# Altium PCB MASTERs26_PCB.PcbDoc (part 2 of 3)
Units mm, origin at the board's own origin, x right, y up, seen from the top; angles counter-clockwise.
Board outline 170 x 105 mm, 4 copper layers (Top Layer, Layer 2, PWR, Bottom Layer), stack 1.58 mm thick; 78 components, 59 nets, 255 pads, 54 vias.
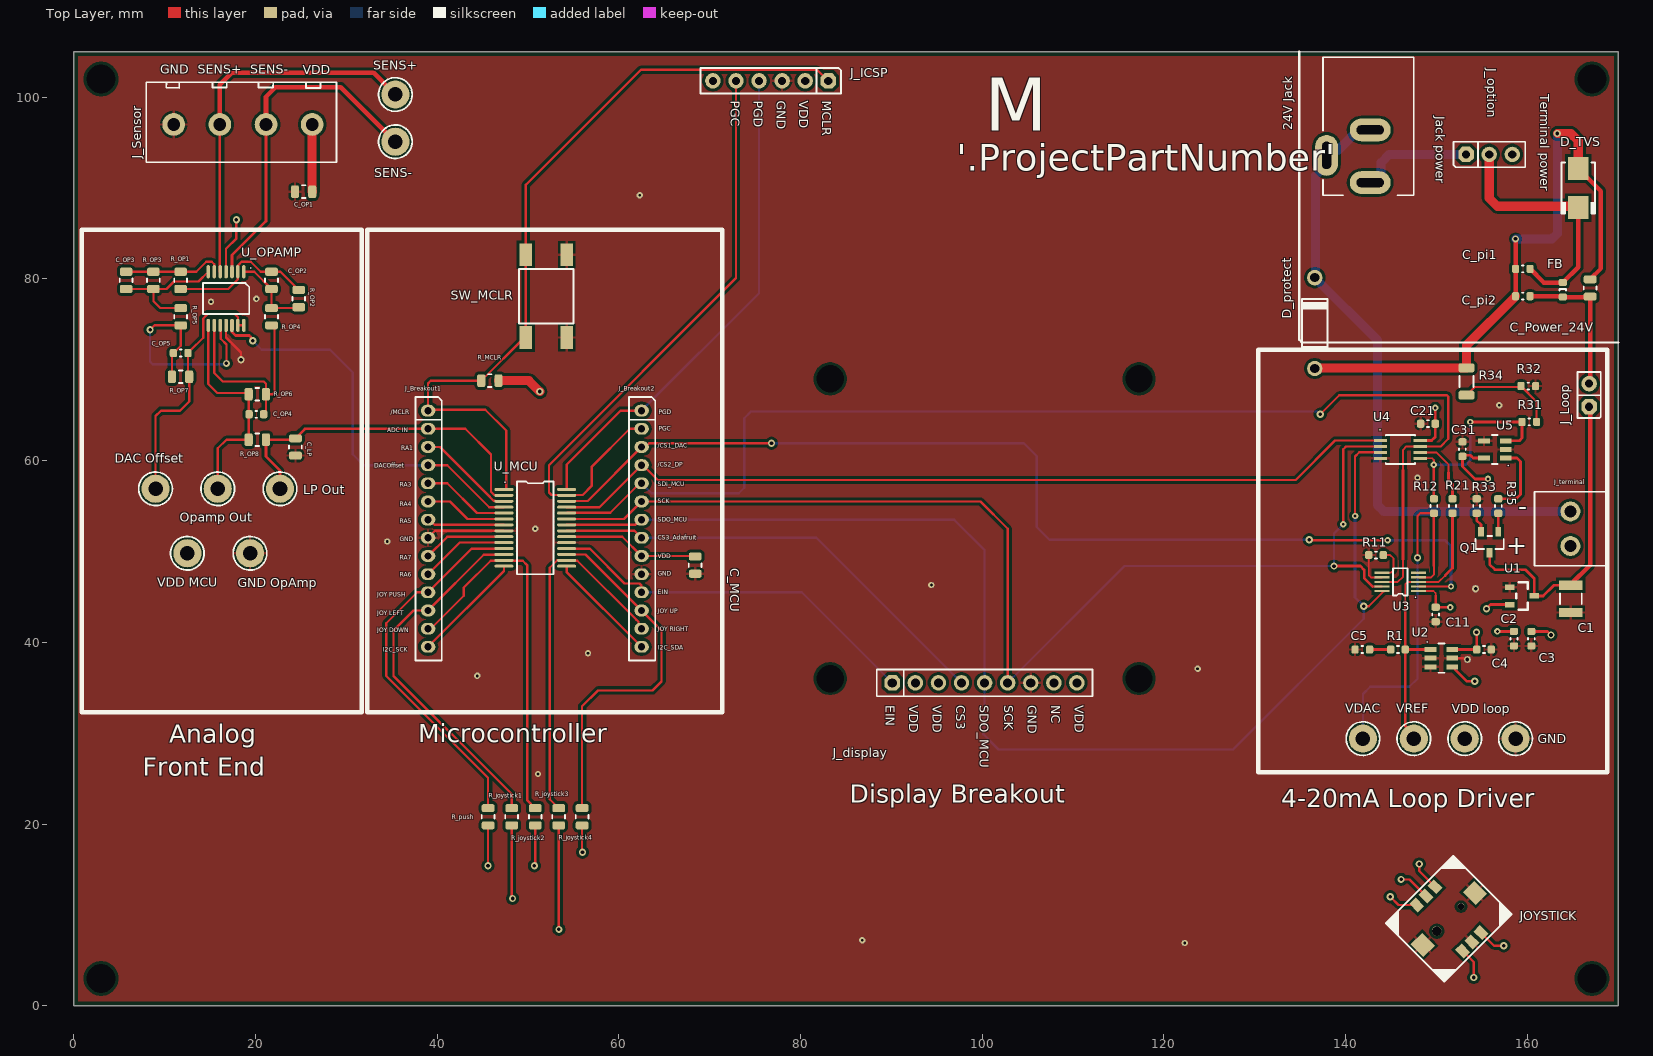
[diagram p0: Top Layer view]

## Part data (continued)
JOYSTICK: library part SWITCH1202, Current=50mA, Manufacturer 1="ALPS ALPINE", Manufacturer Part Number 1=SKRHABE010, Operating Temperature="-40C to 85C", Supplier Part Number 1=688-SKRHAB, Voltage=12VDC, Category=Switch, ComponentLink1Description="SVN Datasheet", ComponentLink1URL=https://chn-vm-apps.microchip.com/mchprepo/parts/Datasheets/SKRH-1370966.pdf, ComponentLink2Description="Local Datasheet", ComponentLink2URL=C:\ALTIUM_WORK\00001_MCHP-CDB\Datasheets\SKRH-1370966.pdf, ComponentLink3Description="Open Symbol", ComponentLink3URL=C:\ALTIUM_WORK\00001_MCHP-CDB\Library\LibraryRefs\SW_TACT_SMD_ALPS_SKRHABE010.SchLib, ComponentLink4Description="Open Footprint", ComponentLink4URL=C:\ALTIUM_WORK\00001_MCHP-CDB\Library\Footprints\SW_TACT_SMD_ALPS_SKRHABE010.PcbLib, ComponentLink5Description="Open Footprint 2", ComponentLink6Description="Open Footprint 3", ComponentLink7Description="Open Footprint 4", Description_="SWITCH JOYSTICK 4-WAY 50mA SKRHABE010 SMD", Dev Tools Status=Production, MCHP-ID=SWITCH1202, Owner="Jesus Aviles", Populated=YES, Quantity Override=1, Restricted Sourcing=No, Revision=2, Status="MCL Design", Supplier 1=Mouser, Symbol=SW_TACT_SMD_ALPS_SKRHABE010, Type=Joystick
PAD1 PAD2 PAD3 PAD4: library part HW1102, Manufacturer 1=3M, Manufacturer Part Number 1="SJ-5003 (BLACK)", Supplier Part Number 1=SJ5003-0-ND, Category=Hardware, ComponentLink1Description="SVN Datasheet", ComponentLink1URL=https://chn-vm-apps.microchip.com/mchprepo/parts/Datasheets/SJ-5003.pdf, ComponentLink2Description="Local Datasheet", ComponentLink2URL=C:\ALTIUM_WORK\00001_MCHP-CDB\Datasheets\SJ-5003.pdf, ComponentLink3Description="Open Symbol", ComponentLink3URL="C:\ALTIUM_WORK\00001_MCHP-CDB\Library\LibraryRefs\Rubber Pad Hemisphere.SchLib", ComponentLink4Description="Open Footprint", ComponentLink4URL=C:\ALTIUM_WORK\00001_MCHP-CDB\Library\Footprints\BUMP_3M_SJ5000_CYLINDRICAL_BLACK_D11.18H5.PcbLib, ComponentLink5Description="Open Footprint 2", ComponentLink6Description="Open Footprint 3", ComponentLink7Description="Open Footprint 4", Description_="MECH HW RUBBER PAD Bumpon Hemisphere 0.44\" x 0.20\" Black", Dev Tools Status=Production, MCHP-ID=HW1102, Owner="Tim Moffat", Populated=MECH, Quantity Override=1, Revision=0, Status="MCL Design", Supplier 1=Digi-Key, Symbol="Rubber Pad Hemisphere", Type="Rubber Pad"
Q1: library part MIC7247, "Transistor MOS", Manufacturer 1="Microchip Technology", Manufacturer Part Number 1=2N7002-G, Operating Temperature="-55C to +150C", Supplier Part Number 1=2N7002-GMCCT-ND, Category=MCHP-Analog, ComponentLink1Description="SVN Datasheet", ComponentLink1URL=https://chn-vm-apps.microchip.com/mchprepo/parts/Datasheets/2N7002.pdf, ComponentLink2Description="Local Datasheet", ComponentLink2URL=C:\ALTIUM_WORK\00001_MCHP-CDB\Datasheets\2N7002.pdf, ComponentLink3Description="Open Symbol", ComponentLink3URL="C:\ALTIUM_WORK\00001_MCHP-CDB\Library\LibraryRefs\Transistor MOS-N GSD.SchLib", ComponentLink4Description="Open Footprint", ComponentLink4URL=C:\ALTIUM_WORK\00001_MCHP-CDB\Library\Footprints\SOT-23-3.PcbLib, ComponentLink5Description="Open Footprint 2", ComponentLink6Description="Open Footprint 3", ComponentLink7Description="Open Footprint 4", Description_="MCHP ANALOG MOSFET N-CH 2N7002-G 60V 115mA SOT-23-3", Dev Tools Status=Production, MCHP-ID=MIC7247, Owner="Mark Loper", Populated=YES, Quantity Override=1, Revision=2, Status="MCL Design", Supplier 1=Digi-Key, Symbol="Transistor MOS-N GSD", Type=MOSFET
R1: library part RSMT0347, "Resistor", Manufacturer 1=Panasonic, Manufacturer 2="NIC Components", Manufacturer 3="Stackpole Electronics Inc", Manufacturer Part Number 1=ERJ-3GEYJ510V, Manufacturer Part Number 2=NRC06J510TRF, Manufacturer Part Number 3=RMCF1/16515%R, Operating Temperature="-55C to +155C", Package=0603, Power=1/10W, Supplier Part Number 1=P51GCT-ND, Temperature Coefficient=200ppm/C, Tolerance=5%, Category=Resistor, ComponentLink1Description="SVN Datasheet", ComponentLink1URL=https://chn-vm-apps.microchip.com/mchprepo/parts/Datasheets/nrc.pdf, ComponentLink2Description="Local Datasheet", ComponentLink2URL=C:\ALTIUM_WORK\00001_MCHP-CDB\Datasheets\nrc.pdf, ComponentLink3Description="Open Symbol", ComponentLink3URL=C:\ALTIUM_WORK\00001_MCHP-CDB\Library\LibraryRefs\Resistor.SchLib, ComponentLink4Description="Open Footprint", ComponentLink4URL=C:\ALTIUM_WORK\00001_MCHP-CDB\Library\Footprints\RES_C_0603.PcbLib, ComponentLink5Description="Open Footprint 2", ComponentLink6Description="Open Footprint 3", ComponentLink7Description="Open Footprint 4", Composition=TKF, Description_="RES TKF 51R 5% 1/10W SMD 0603", Dev Tools Status=Production, MCHP-ID=RSMT0347, Populated=Yes, Quantity Override=1, Revision=1, Status="MCL Design", Supplier 1=Digi-Key, Supplier 2="NIC Components", Supplier 3="Stackpole Electronics Inc", Supplier Part Number 2=NRC06J510TRF, Supplier Part Number 3=RMCF1/16515%R, Symbol=Resistor, Type="RES SMD"
R11: library part RSMT0026, "Resistor", Manufacturer 1=Panasonic, Manufacturer 3=ROHM, Manufacturer 4="Stackpole Electronics Inc", Manufacturer 5="KOA Speer", Manufacturer Part Number 1=ERJ-3GEYJ104V, Manufacturer Part Number 2=ERJ-3GSYJ104V, Manufacturer Part Number 3=MCR03EZPJ104, Manufacturer Part Number 4=RMCF0603JT100K, Manufacturer Part Number 5=RK73B1JTTD104J, Operating Temperature="-55C to +155C", Package=0603, Power=1/10W, Supplier Part Number 1=P100KGTR-ND, Temperature Coefficient=200ppm/C, Tolerance=5%, Voltage=75V, Category=Resistor, ComponentLink1Description="SVN Datasheet", ComponentLink1URL=https://chn-vm-apps.microchip.com/mchprepo/parts/Datasheets/AOA0000CE1.pdf, ComponentLink2Description="Local Datasheet", ComponentLink2URL=C:\ALTIUM_WORK\00001_MCHP-CDB\Datasheets\AOA0000CE1.pdf, ComponentLink3Description="Open Symbol", ComponentLink3URL=C:\ALTIUM_WORK\00001_MCHP-CDB\Library\LibraryRefs\Resistor.SchLib, ComponentLink4Description="Open Footprint", ComponentLink4URL=C:\ALTIUM_WORK\00001_MCHP-CDB\Library\Footprints\RES_C_0603.PcbLib, ComponentLink5Description="Open Footprint 2", ComponentLink6Description="Open Footprint 3", ComponentLink7Description="Open Footprint 4", Composition=TKF, Description_="RES TKF 100k 5% 1/10W SMD 0603 AEC-Q200", Dev Tools Status=Production, Manufacturer 2=Panasonic, MCHP-ID=RSMT0026, Populated=Yes, Quantity Override=1, Revision=3, Status="MCL Design", Supplier 1=Digi-Key, Supplier 2=Digi-Key, Supplier 3=Digi-Key, Supplier 4="KOA Speer", Supplier Part Number 2=RHM100KGTR-ND, Supplier Part Number 3=RMCF0603JT100KTR-ND, Supplier Part Number 4=RK73B1JTTD104J, Symbol=Resistor, Type="RES SMD"
R12: library part RES1598, "Resistor", Manufacturer 1="Panasonic Electronic Components                                                                               Panasonic Electronic Components", Manufacturer Part Number 1=ERA-3AEB153V, Operating Temperature="-55°C ~ 155°C", Package=0603, Power="0.1W, 1/10W", Supplier Part Number 1=P15KDBCT-ND, Temperature Coefficient=±25ppm/°C, Tolerance=0.1%, Category=Resistor, ComponentLink1Description="SVN Datasheet", ComponentLink2Description="Local Datasheet", ComponentLink3Description="Open Symbol", ComponentLink3URL=C:\ALTIUM_WORK\00001_MCHP-CDB\Library\LibraryRefs\Resistor.SchLib, ComponentLink4Description="Open Footprint", ComponentLink4URL=C:\ALTIUM_WORK\00001_MCHP-CDB\Library\Footprints\RES_C_0603.PcbLib, ComponentLink5Description="Open Footprint 2", ComponentLink6Description="Open Footprint 3", ComponentLink7Description="Open Footprint 4", Composition=TF, Description_="RES TF 15k 0.1% 1/10W SMD 0603", Dev Tools Status=Production, MCHP-ID=RES1598, Owner="Jose Garcia", Populated=YES, Quantity Override=1, Revision=2, Status="MCL Design", Supplier 1=Digi-Key, Symbol=Resistor, Type="RES SMD"
R21: library part RES1183, "Resistor", Manufacturer 1=Panasonic, Manufacturer Part Number 1=ERJ-3EKF4702V, Operating Temperature="-55C to +155C", Package=0603, Power=1/10W, Supplier Part Number 1=P47.0KHCT-ND, Temperature Coefficient=100ppm/C, Tolerance=1%, Voltage=75V, Category=Resistor, ComponentLink1Description="SVN Datasheet", ComponentLink1URL=https://chn-vm-apps.microchip.com/mchprepo/parts/Datasheets/AOA0000CE2.pdf, ComponentLink2Description="Local Datasheet", ComponentLink2URL=C:\ALTIUM_WORK\00001_MCHP-CDB\Datasheets\AOA0000CE2.pdf, ComponentLink3Description="Open Symbol", ComponentLink3URL=C:\ALTIUM_WORK\00001_MCHP-CDB\Library\LibraryRefs\Resistor.SchLib, ComponentLink4Description="Open Footprint", ComponentLink4URL=C:\ALTIUM_WORK\00001_MCHP-CDB\Library\Footprints\RES_C_0603.PcbLib, ComponentLink5Description="Open Footprint 2", ComponentLink6Description="Open Footprint 3", ComponentLink7Description="Open Footprint 4", Composition=TKF, Description_="RES TKF 47k 1% 1/10W SMD 0603", Dev Tools Status=Production, MCHP-ID=RES1183, Owner="Adrian M (M91404)", Populated=YES, Quantity Override=1, Revision=0, Status="MCL Design", Supplier 1=Digi-Key, Symbol=Resistor, Type="RES SMD"
R31: library part RES1130, "Resistor", Manufacturer 1=Panasonic, Manufacturer Part Number 1=ERJ-3EKF2201V, Operating Temperature="-55C to +155C", Package=0603, Power=1/10W, Supplier Part Number 1=P2.20KHCT-ND, Temperature Coefficient=100ppm/C, Tolerance=1%, Voltage=75V, Category=Resistor, ComponentLink1Description="SVN Datasheet", ComponentLink1URL=https://chn-vm-apps.microchip.com/mchprepo/parts/Datasheets/AOA0000CE2.pdf, ComponentLink2Description="Local Datasheet", ComponentLink2URL=C:\ALTIUM_WORK\00001_MCHP-CDB\Datasheets\AOA0000CE2.pdf, ComponentLink3Description="Open Symbol", ComponentLink3URL=C:\ALTIUM_WORK\00001_MCHP-CDB\Library\LibraryRefs\Resistor.SchLib, ComponentLink4Description="Open Footprint", ComponentLink4URL=C:\ALTIUM_WORK\00001_MCHP-CDB\Library\Footprints\RES_C_0603.PcbLib, ComponentLink5Description="Open Footprint 2", ComponentLink6Description="Open Footprint 3", ComponentLink7Description="Open Footprint 4", Composition=TKF, Description_="RES TKF 2.2k 1% 1/10W SMD 0603", Dev Tools Status=Production, MCHP-ID=RES1130, Owner="Bogdan P (M91398)", Populated=Yes, Quantity Override=1, Revision=0, Status="MCL Design", Supplier 1=Digi-Key, Symbol=Resistor, Type="RES SMD"
R32 R33: library part RES1560, "Resistor", Manufacturer 1="Panasonic Electronic Components", Manufacturer Part Number 1=ERJ-3EKF22R0V, Operating Temperature="-55C to +155C", Package=0603, Power=1/10W, Supplier Part Number 1=P22.0HCT-ND, Temperature Coefficient=100ppm/C, Tolerance=1%, Voltage=75V, Category=Resistor, ComponentLink1Description="SVN Datasheet", ComponentLink1URL=https://chn-vm-apps.microchip.com/mchprepo/parts/Datasheets/AOA0000CE2.pdf, ComponentLink2Description="Local Datasheet", ComponentLink2URL=C:\ALTIUM_WORK\00001_MCHP-CDB\Datasheets\AOA0000CE2.pdf, ComponentLink3Description="Open Symbol", ComponentLink3URL=C:\ALTIUM_WORK\00001_MCHP-CDB\Library\LibraryRefs\Resistor.SchLib, ComponentLink4Description="Open Footprint", ComponentLink4URL=C:\ALTIUM_WORK\00001_MCHP-CDB\Library\Footprints\RES_C_0603.PcbLib, ComponentLink5Description="Open Footprint 2", ComponentLink6Description="Open Footprint 3", ComponentLink7Description="Open Footprint 4", Composition=TKF, Description_="RES TKF 22R 1% 1/10W SMD 0603", Dev Tools Status=Production, MCHP-ID=RES1560, Populated=YES, Quantity Override=1, Revision=1, Status="MCL Design", Supplier 1=Digi-Key, Symbol=Resistor, Type="RES SMD"
R34: library part RSMT0390, "Resistor", Manufacturer 1=ROHM, Manufacturer Part Number 1=MCR18EZHF2490, Operating Temperature="-55C to +155C", Package=1206, Power=1/4W, Supplier Part Number 1=RHM249FCT-ND, Temperature Coefficient=100ppm/C, Tolerance=1%, Voltage=200V, Category=Resistor, ComponentLink1Description="SVN Datasheet", ComponentLink1URL=https://chn-vm-apps.microchip.com/mchprepo/parts/Datasheets/MCR18_Thick_Film_Rectangular_Series.pdf, ComponentLink2Description="Local Datasheet", ComponentLink2URL=C:\ALTIUM_WORK\00001_MCHP-CDB\Datasheets\MCR18_Thick_Film_Rectangular_Series.pdf, ComponentLink3Description="Open Symbol", ComponentLink3URL=C:\ALTIUM_WORK\00001_MCHP-CDB\Library\LibraryRefs\Resistor.SchLib, ComponentLink4Description="Open Footprint", ComponentLink4URL=C:\ALTIUM_WORK\00001_MCHP-CDB\Library\Footprints\RES_C_1206.PcbLib, ComponentLink5Description="Open Footprint 2", ComponentLink6Description="Open Footprint 3", ComponentLink7Description="Open Footprint 4", Composition=TKF, Description_="RES TKF 249R 1% 1/4W SMD 1206", Dev Tools Status=Production, MCHP-ID=RSMT0390, Populated=Yes, Quantity Override=1, Revision=1, Status="MCL Design", Supplier 1=Digi-Key, Symbol=Resistor, Type="RES SMD"
R35: library part RES1110, "Resistor", Manufacturer 1=Panasonic, Manufacturer Part Number 1=ERJ-3EKF1801V, Operating Temperature="-55C to +155C", Package=0603, Power=1/10W, Supplier Part Number 1=P1.80KHCT-ND, Temperature Coefficient=100ppm/C, Tolerance=1%, Voltage=75V, Category=Resistor, ComponentLink1Description="SVN Datasheet", ComponentLink1URL=https://chn-vm-apps.microchip.com/mchprepo/parts/Datasheets/AOA0000CE2.pdf, ComponentLink2Description="Local Datasheet", ComponentLink2URL=C:\ALTIUM_WORK\00001_MCHP-CDB\Datasheets\AOA0000CE2.pdf, ComponentLink3Description="Open Symbol", ComponentLink3URL=C:\ALTIUM_WORK\00001_MCHP-CDB\Library\LibraryRefs\Resistor.SchLib, ComponentLink4Description="Open Footprint", ComponentLink4URL=C:\ALTIUM_WORK\00001_MCHP-CDB\Library\Footprints\RES_C_0603.PcbLib, ComponentLink5Description="Open Footprint 2", ComponentLink6Description="Open Footprint 3", ComponentLink7Description="Open Footprint 4", Composition=TKF, Description_="RES TKF 1.8k 1% 1/10W SMD 0603", Dev Tools Status=Production, MCHP-ID=RES1110, Owner="Bogdan P (M91398)", Populated=Yes, Quantity Override=1, Revision=0, Status="MCL Design", Supplier 1=Digi-Key, Symbol=Resistor, Type="RES SMD"
R_joystick1 R_joystick2 R_joystick3 R_joystick4 R_push: library part RES1221, Manufacturer 1=Vishay, Manufacturer Part Number 1=CRCW08051K00FKEA, Operating Temperature="-55C to +155C", Package=0805, Power=1/8W, Supplier Part Number 1=541-1.00KCCT-ND, Temperature Coefficient=100ppm/C, Tolerance=1%, Voltage=150V, Category=Resistor, ComponentLink1Description="SVN Datasheet", ComponentLink1URL=https://chn-vm-apps.microchip.com/mchprepo/parts/Datasheets/dcrcwe3.pdf, ComponentLink2Description="Local Datasheet", ComponentLink2URL=C:\ALTIUM_WORK\00001_MCHP-CDB\Datasheets\dcrcwe3.pdf, ComponentLink3Description="Open Symbol", ComponentLink3URL=C:\ALTIUM_WORK\00001_MCHP-CDB\Library\LibraryRefs\Resistor.SchLib, ComponentLink4Description="Open Footprint", ComponentLink4URL=C:\ALTIUM_WORK\00001_MCHP-CDB\Library\Footprints\RES_C_0805.PcbLib, ComponentLink5Description="Open Footprint 2", ComponentLink6Description="Open Footprint 3", ComponentLink7Description="Open Footprint 4", Composition=TKF, Description_="RES TKF 1k 1% 1/8W SMD 0805", Dev Tools Status=Production, MCHP-ID=RES1221, Owner="Mihai T (M91442)", Populated=Yes, Quantity Override=1, Revision=0, Status="MCL Design", Supplier 1=Digi-Key, Supplier 2=Farnell, Supplier Part Number 2=1469847RL, Symbol=Resistor, Type="RES SMD"
R_MCLR R_OP1 R_OP4 R_OP5: library part RES2297, Manufacturer 1="TE Connectivity", Manufacturer Part Number 1=CRGH0805F10K, Package=0805, Power=1/3W, Supplier Part Number 1=A126417CT-ND, Tolerance=1%, Category=Resistor, ComponentLink1Description="SVN Datasheet", ComponentLink1URL=https://chn-vm-apps.microchip.com/mchprepo/parts/Datasheets/CRGH_Series_Resistors.pdf, ComponentLink2Description="Local Datasheet", ComponentLink2URL=C:\ALTIUM_WORK\00001_MCHP-CDB\Datasheets\CRGH_Series_Resistors.pdf, ComponentLink3Description="Open Symbol", ComponentLink3URL=C:\ALTIUM_WORK\00001_MCHP-CDB\Library\LibraryRefs\Resistor.SchLib, ComponentLink4Description="Open Footprint", ComponentLink4URL=C:\ALTIUM_WORK\00001_MCHP-CDB\Library\Footprints\RES_C_0805.PcbLib, ComponentLink5Description="Open Footprint 2", ComponentLink6Description="Open Footprint 3", ComponentLink7Description="Open Footprint 4", Composition=TKF, Description_="RES TKF 10K 1% 1/3W SMD 0805", Dev Tools Status=Production, MCHP-ID=RES2297, Owner="Mark Loper", Populated=YES, Quantity Override=1, Restricted Sourcing=No, Revision=3, Status="MCL Design", Supplier 1=Digi-Key, Symbol=Resistor, Type="RES SMD"
R_OP2 R_OP3: library part RSMT0025, Manufacturer 1=Panasonic, Manufacturer 2="Stackpole Electronics Inc", Manufacturer 3=Yageo, Manufacturer Part Number 1=ERJ-6GEYJ104V, Manufacturer Part Number 2=RMCF0805JT100K, Manufacturer Part Number 3=RC0805JR-07100KL, Operating Temperature="-55C to +155C", Package=0805, Power=1/8W, Supplier Part Number 1=P100KACT-ND, Temperature Coefficient=100ppm/C, Tolerance=5%, Voltage=150V, Category=Resistor, ComponentLink1Description="SVN Datasheet", ComponentLink1URL=https://chn-vm-apps.microchip.com/mchprepo/parts/Datasheets/PYu-RC0805_51_RoHS_L_4.pdf, ComponentLink2Description="Local Datasheet", ComponentLink2URL=C:\ALTIUM_WORK\00001_MCHP-CDB\Datasheets\PYu-RC0805_51_RoHS_L_4.pdf, ComponentLink3Description="Open Symbol", ComponentLink3URL=C:\ALTIUM_WORK\00001_MCHP-CDB\Library\LibraryRefs\Resistor.SchLib, ComponentLink4Description="Open Footprint", ComponentLink4URL=C:\ALTIUM_WORK\00001_MCHP-CDB\Library\Footprints\RES_C_0805.PcbLib, ComponentLink5Description="Open Footprint 2", ComponentLink6Description="Open Footprint 3", ComponentLink7Description="Open Footprint 4", Composition=TKF, Description_="RES TKF 100k 5% 1/8W SMD 0805", Dev Tools Status=Production, MCHP-ID=RSMT0025, Populated=Yes, Quantity Override=1, Revision=2, Status="MCL Design", Supplier 1=Digi-Key, Supplier 2=Digi-Key, Supplier 3=Digi-Key, Supplier 4=Digi-Key, Supplier Part Number 2=P100KATR-ND, Supplier Part Number 3=RMCF0805JT100KTR-ND, Supplier Part Number 4=311-100KARTR-ND, Symbol=Resistor, Type="RES SMD"
R_OP6 R_OP7: library part RES2850, Manufacturer 1="Panasonic Electronic Components", Manufacturer 2="Stackpole Electronics Inc", Manufacturer 3=Bourns, Manufacturer 4=Panasonic, Manufacturer 5=Vishay, Manufacturer Part Number 1=ERJ-6ENF2003V, Manufacturer Part Number 2=RMCF0805FT200K, Manufacturer Part Number 3=CR0805-FX-2003ELF, Manufacturer Part Number 4=ERJ-U06F2003V, Manufacturer Part Number 5=RCA0805200KFKEA, Operating Temperature="-55C to +155C", Package=0805, Power=1/8W, Supplier Part Number 1=P200KCTR-ND, Temperature Coefficient=100ppm/C, Tolerance=1%, Voltage=150V, Category=Resistor, ComponentLink1Description="SVN Datasheet", ComponentLink1URL=https://chn-vm-apps.microchip.com/mchprepo/parts/Datasheets/AOA0000C304.pdf, ComponentLink2Description="Local Datasheet", ComponentLink2URL=C:\ALTIUM_WORK\00001_MCHP-CDB\Datasheets\AOA0000C304.pdf, ComponentLink3Description="Open Symbol", ComponentLink3URL=C:\ALTIUM_WORK\00001_MCHP-CDB\Library\LibraryRefs\Resistor.SchLib, ComponentLink4Description="Open Footprint", ComponentLink4URL=C:\ALTIUM_WORK\00001_MCHP-CDB\Library\Footprints\RES_C_0805.PcbLib, ComponentLink5Description="Open Footprint 2", ComponentLink6Description="Open Footprint 3", ComponentLink7Description="Open Footprint 4", Composition=TF, Description_="RES TF 200k 1% 1/8W SMD 0805", Dev Tools Status=Design, MCHP-ID=RES2850, Owner="Florin Paun", Populated=YES, Quantity Override=1, Restricted Sourcing=No, Revision=3, Status="MCL Design", Supplier 1=Digi-Key, Supplier 2=Digi-Key, Supplier 3=Mouser, Supplier 4=Mouser, Supplier 5=Mouser, Supplier Part Number 2=RMCF0805FT200KTR-ND, Supplier Part Number 3=652-CR0805FX-2003ELF, Supplier Part Number 4=667-ERJ-U06F2003V, Supplier Part Number 5=71-RCA0805200KFKEA, Symbol=Resistor, Type="RES SMD"
R_OP8: library part RSMT0091, Manufacturer 1=Panasonic, Manufacturer 2=ROHM, Manufacturer 3=Yageo, Manufacturer 5="KOA Speer", Manufacturer Part Number 1=ERJ-6GEYJ472V, Manufacturer Part Number 2=MCR10EZHJ472, Manufacturer Part Number 3=RC0805JR-074K7L, Manufacturer Part Number 4=9C08052A4701JLHFT, Manufacturer Part Number 5=RK73B2ATTD472J, Manufacturer Part Number 6=9C08052A4701JLPFT, Operating Temperature="-55C to +155C", Package=0805, Power=1/8W, Supplier Part Number 1=P4.7KATR-ND, Temperature Coefficient=100ppm/C, Tolerance=5%, Voltage=150V, Category=Resistor, ComponentLink1Description="SVN Datasheet", ComponentLink1URL=https://chn-vm-apps.microchip.com/mchprepo/parts/Datasheets/PYu-RC0805_51_RoHS_L_4.pdf, ComponentLink2Description="Local Datasheet", ComponentLink2URL=C:\ALTIUM_WORK\00001_MCHP-CDB\Datasheets\PYu-RC0805_51_RoHS_L_4.pdf, ComponentLink3Description="Open Symbol", ComponentLink3URL=C:\ALTIUM_WORK\00001_MCHP-CDB\Library\LibraryRefs\Resistor.SchLib, ComponentLink4Description="Open Footprint", ComponentLink4URL=C:\ALTIUM_WORK\00001_MCHP-CDB\Library\Footprints\RES_C_0805.PcbLib, ComponentLink5Description="Open Footprint 2", ComponentLink6Description="Open Footprint 3", ComponentLink7Description="Open Footprint 4", Composition=TKF, Description_="RES TKF 4.7k 5% 1/8W SMD 0805", Dev Tools Status=Production, Manufacturer 4=Yageo, Manufacturer 6=Yageo, MCHP-ID=RSMT0091, Populated=Yes, Quantity Override=1, Revision=2, Status="MCL Design", Supplier 1=Digi-Key, Supplier 2=Digi-Key, Supplier 3=Digi-Key, Supplier 4=Digi-Key, Supplier 5=Digi-Key, Supplier 6="KOA Speer", Supplier 7=Yageo, Supplier Part Number 2=P4.7KACT-ND, Supplier Part Number 3=RHM4.7KACT-ND, Supplier Part Number 4=311-4.7KARTR-ND, Supplier Part Number 5=311-4.7KACT-ND, Supplier Part Number 6=RK73B2ATTD472J, Supplier Part Number 7=9C08052A4701JLPFT, Symbol=Resistor, Type="RES SMD"
SW_MCLR: library part SWITCH0003, "Switch", Current=50mA, Manufacturer 1=E-Switch, Manufacturer 4=OMRON, Manufacturer 8="Switech Electronics Co. Ltd", Manufacturer Part Number 1=TL3301NF260QG/TR, Manufacturer Part Number 2=TL3301NF260QG, Manufacturer Part Number 3=TL3301NF160QG/TR, Manufacturer Part Number 4=B3S-1002P, Manufacturer Part Number 5=B3S-1000P, Manufacturer Part Number 6=B3S-1000, Manufacturer Part Number 7=B3S-1002, Manufacturer Part Number 8=TS2A-043C(R)-G9-H, Operating Temperature="-20C to +70C", Supplier Part Number 1=EG1868CT-ND, Voltage=12V, Category=Switch, ComponentLink1Description="SVN Datasheet", ComponentLink1URL=https://chn-vm-apps.microchip.com/mchprepo/parts/Datasheets/TL3301.pdf, ComponentLink2Description="Local Datasheet", ComponentLink2URL=C:\ALTIUM_WORK\00001_MCHP-CDB\Datasheets\TL3301.pdf, ComponentLink3Description="Open Symbol", ComponentLink3URL="C:\ALTIUM_WORK\00001_MCHP-CDB\Library\LibraryRefs\Switch 4 Pin.SchLib", ComponentLink4Description="Open Footprint", ComponentLink4URL=C:\ALTIUM_WORK\00001_MCHP-CDB\Library\Footprints\SW_SMD_6mmX6mm_TL3301.PcbLib, ComponentLink5Description="Open Footprint 2", ComponentLink6Description="Open Footprint 3", ComponentLink7Description="Open Footprint 4", Description_="SWITCH TACT SPST 12V 50mA TL3301NF160QG/TR SMD", Dev Tools Status=Production, Manufacturer 2=E-Switch, Manufacturer 3=E-Switch, Manufacturer 5=OMRON, Manufacturer 6=OMRON, Manufacturer 7=OMRON, MCHP-ID=SWITCH0003, Populated=Yes, Quantity Override=1, Revision=4, Status="MCL Design", Supplier 1=Digi-Key, Supplier 2=Digi-Key, Supplier 3=Digi-Key, Supplier 4=Digi-Key, Supplier 5=Digi-Key, Supplier 6=Digi-Key, Supplier 7=Digi-Key, Supplier 8="Switech Electronics Co. Ltd", Supplier Part Number 2=EG1868TR-ND, Supplier Part Number 3=EG1867CT-ND, Supplier Part Number 4=SW837CT-ND, Supplier Part Number 5=SW836CT-ND, Supplier Part Number 6=SW415-ND, Supplier Part Number 7=SW416-ND, Supplier Part Number 8=TS2A-043C(R)-G9-H, Symbol="Switch 4 Pin", Type=Tactile
U1: library part MIC9136, "LDO", Manufacturer 1="Microchip Production", Category=MCHP-Analog, ComponentLink1Description="SVN Datasheet", ComponentLink1URL=https://chn-vm-apps.microchip.com/mchprepo/parts/Datasheets/MCP1792-Family-Data-Sheet-DS20006229C.pdf, ComponentLink2Description="Local Datasheet", ComponentLink2URL=C:\ALTIUM_WORK\00001_MCHP-CDB\Datasheets\MCP1792-Family-Data-Sheet-DS20006229C.pdf, ComponentLink3Description="Open Symbol", ComponentLink3URL="C:\ALTIUM_WORK\00001_MCHP-CDB\Library\LibraryRefs\MCP1754S SOT-23A-3.SchLib", ComponentLink4Description="Open Footprint", ComponentLink4URL=C:\ALTIUM_WORK\00001_MCHP-CDB\Library\Footprints\SOT-23A-3.PcbLib, ComponentLink5Description="Open Footprint 2", ComponentLink6Description="Open Footprint 3", ComponentLink7Description="Open Footprint 4", Description_="MCHP ANALOG VOLTAGE REGULATOR  3.3V 3LD MCP1792T-3302H/CB SOT-23A-3", Dev Tools Status=Design, Manufacturer Part Number 1=MIC9136, MCHP-ID=MIC9136, Owner="Cristina Salanti", Populated=YES, Quantity Override=1, Revision=1, Status="MCL Design", Supplier 1="Microchip Production", Supplier Part Number 1=MIC9136, Symbol="MCP1754S SOT-23A-3", Type="Voltage Regulator"
U2: library part MIC9451, "High-Precision Buffered Voltage Reference", Manufacturer 1="Microchip Technology", Manufacturer Part Number 1=MCP1501T-25E/CHY, Operating Temperature="-40°C ~ 125°C (TA)", Supplier Part Number 1=MCP1501T-25E/CHYTR-ND, Category=MCHP-Analog, ComponentLink1Description="SVN Datasheet", ComponentLink1URL=https://chn-vm-apps.microchip.com/mchprepo/parts/Datasheets/https://ww1.microchip.com/downloads/en/DeviceDoc/20005474E.pdf, ComponentLink2Description="Local Datasheet", ComponentLink2URL=C:\ALTIUM_WORK\00001_MCHP-CDB\Datasheets\https://ww1.microchip.com/downloads/en/DeviceDoc/20005474E.pdf, ComponentLink3Description="Open Symbol", ComponentLink3URL="C:\ALTIUM_WORK\00001_MCHP-CDB\Library\LibraryRefs\MCP1501 SOT-23-6.SchLib", ComponentLink4Description="Open Footprint", ComponentLink4URL=C:\ALTIUM_WORK\00001_MCHP-CDB\Library\Footprints\SOT-23-6.PcbLib, ComponentLink5Description="Open Footprint 2", ComponentLink6Description="Open Footprint 3", ComponentLink7Description="Open Footprint 4", Description_="MCHP ANALOG VREF 2.50V MCP1501T-25E/CHY SOT-23-6", Dev Tools Status=Production, MCHP-ID=MIC9451, Owner="Jose Garcia", Populated=YES, Quantity Override=1, Revision=2, Status="MCL Design", Supplier 1=Digi-Key, Symbol="MCP1501 SOT-23-6", Type=VREF
U3: library part MIC9655, Manufacturer 1="Microchip Technology", Manufacturer Part Number 1=MCP48CMD21T-E/UN, Operating Temperature="-40C to +125C", Category=MCHP-Analog, ComponentLink1Description="SVN Datasheet", ComponentLink1URL=https://www.microchip.com/sitesearch/search/Product%20and%20Development%20Tools/MCP48CMD21T-E/UN, ComponentLink2Description="Local Datasheet", ComponentLink3Description="Open Symbol", ComponentLink3URL=C:\ALTIUM_WORK\00001_MCHP-CDB\Library\LibraryRefs\MCP48CXDX1_MSOP-10.SchLib, ComponentLink4Description="Open Footprint", ComponentLink4URL=C:\ALTIUM_WORK\00001_MCHP-CDB\Library\Footprints\MSOP-10.PcbLib, ComponentLink5Description="Open Footprint 2", ComponentLink6Description="Open Footprint 3", ComponentLink7Description="Open Footprint 4", Description_="MCHP ANALOG DAC 1-Ch 12-bit MCP48CMD21T-E/UN MSOP-10", Dev Tools Status=Design, MCHP-ID=MIC9655, Owner="Alexandru Chiser", Populated=YES, Quantity Override=1, Revision=1, Status="MCL Design", Supplier 1="Microchip Technology", Supplier Part Number 1=MCP48CMD21T-E/UN, Symbol=MCP48CXDX1_MSOP-10, Type=DAC
U4: library part MIC9715, Manufacturer 1="Microchip Technology", Manufacturer Part Number 1=MCP4152T-503E/MS, Operating Temperature="-40°C ~ 125°C", Supplier Part Number 1=MCP4152T-503E/MSTR-ND, Category=MCHP-Analog, ComponentLink1Description="SVN Datasheet", ComponentLink1URL=https://chn-vm-apps.microchip.com/mchprepo/parts/Datasheets/22060b.pdf, ComponentLink2Description="Local Datasheet", ComponentLink2URL=C:\ALTIUM_WORK\00001_MCHP-CDB\Datasheets\22060b.pdf, ComponentLink3Description="Open Symbol", ComponentLink3URL="C:\ALTIUM_WORK\00001_MCHP-CDB\Library\LibraryRefs\MCP41X2 SOIC-8_PDIP-8_MSOP-8.SchLib", ComponentLink4Description="Open Footprint", ComponentLink4URL=C:\ALTIUM_WORK\00001_MCHP-CDB\Library\Footprints\MSOP-8.PcbLib, ComponentLink5Description="Open Footprint 2", ComponentLink6Description="Open Footprint 3", ComponentLink7Description="Open Footprint 4", Description_="MCHP ANALOG DIGIPOT 50KOHM 257TAP 8MSOP", Dev Tools Status=Design, MCHP-ID=MIC9715, Owner="Jose Garcia", Populated=YES, Quantity Override=1, Revision=2, Status="MCL Design", Supplier 1=Digi-Key, Symbol="MCP41X2 SOIC-8_PDIP-8_MSOP-8", Type=Digipot
U5: library part MIC0507, "OPAMP", Manufacturer 1=Microchip, Manufacturer Part Number 1=MCP6021T-E/OT, Operating Temperature="-40C to +125C", Category=MCHP-Analog, ComponentLink1Description="SVN Datasheet", ComponentLink1URL=https://www.microchip.com/sitesearch/search/Product%20and%20Development%20Tools/MCP6021T-E/OT, ComponentLink2Description="Local Datasheet", ComponentLink3Description="Open Symbol", ComponentLink3URL="C:\ALTIUM_WORK\00001_MCHP-CDB\Library\LibraryRefs\MCP6XX1_6 SOT-23-5_SC-70-5.SchLib", ComponentLink4Description="Open Footprint", ComponentLink4URL=C:\ALTIUM_WORK\00001_MCHP-CDB\Library\Footprints\SOT-23-5.PcbLib, ComponentLink5Description="Open Footprint 2", ComponentLink6Description="Open Footprint 3", ComponentLink7Description="Open Footprint 4", Description_="MCHP ANALOG OPAMP 1-Ch 10MHz MCP6021T-E/OT SOT-23-5", Dev Tools Status=Production, MCHP-ID=MIC0507, Populated=Yes, Quantity Override=1, Revision=1, Status="MCL Design", Supplier 1=Microchip, Supplier Part Number 1=MCP6021T-E/OT, Symbol="MCP6XX1_6 SOT-23-5_SC-70-5", Type=OpAmp
U_MCU: library part MIC9964, Manufacturer 1="Microchip Technology", Manufacturer Part Number 1=PIC18F26Q71-I/SS, Manufacturer Part Number 2=PIC18F26Q71T-I/SS, Operating Temperature="-40C to +85C", Category=MCHP-Microcontroller, ComponentLink1Description="SVN Datasheet", ComponentLink1URL=https://www.microchip.com/sitesearch/search/Product%20and%20Development%20Tools/PIC18F26Q71-I/SS, ComponentLink2Description="Local Datasheet", ComponentLink3Description="Open Symbol", ComponentLink3URL="C:\ALTIUM_WORK\00001_MCHP-CDB\Library\LibraryRefs\PIC18F2XK42 SPDIP-28_SOIC-28_SSOP-28.SchLib", ComponentLink4Description="Open Footprint", ComponentLink4URL=C:\ALTIUM_WORK\00001_MCHP-CDB\Library\Footprints\SSOP-28_P0.65.PcbLib, ComponentLink5Description="Open Footprint 2", ComponentLink6Description="Open Footprint 3", ComponentLink7Description="Open Footprint 4", Description_="MCHP MCU 8-BIT 64MHz 64kB 4kB PIC18F26Q71-I/SS SSOP-28", Dev Tools Status=Production, Manufacturer 2="Microchip Technology", MCHP-ID=MIC9964, Owner="Are Halvorsen", Populated=YES, Quantity Override=1, Restricted Sourcing=No, Revision=1, Status="MCL Design", Supplier 1="Microchip Technology", Supplier 2="Microchip Technology", Supplier Part Number 1=PIC18F26Q71-I/SS, Supplier Part Number 2=PIC18F26Q71T-I/SS, Symbol="PIC18F2XK42 SPDIP-28_SOIC-28_SSOP-28", Type=8-Bit
U_OPAMP: library part MIC9608, "OPAMP", Manufacturer 1="Microchip Technology", Manufacturer Part Number 1=MCP6V14-E/ST, Operating Temperature="-40C to +125C", Category=MCHP-Analog, ComponentLink1Description="SVN Datasheet", ComponentLink1URL=https://chn-vm-apps.microchip.com/mchprepo/parts/Datasheets/20005124B.pdf, ComponentLink2Description="Local Datasheet", ComponentLink2URL=C:\ALTIUM_WORK\00001_MCHP-CDB\Datasheets\20005124B.pdf, ComponentLink3Description="Open Symbol", ComponentLink3URL="C:\ALTIUM_WORK\00001_MCHP-CDB\Library\LibraryRefs\MCP6XX4_9 SOIC-14_TSSOP-14_PDIP-14.SchLib", ComponentLink4Description="Open Footprint", ComponentLink4URL=C:\ALTIUM_WORK\00001_MCHP-CDB\Library\Footprints\TSSOP-14.PcbLib, ComponentLink5Description="Open Footprint 2", ComponentLink6Description="Open Footprint 3", ComponentLink7Description="Open Footprint 4", Description_="MCHP ANALOG OPAMP 4-Ch 80kHz MCP6V14-E/ST TSSOP-14", Dev Tools Status=Design, MCHP-ID=MIC9608, Owner="Alexandru Chiser", Populated=YES, Quantity Override=1, Restricted Sourcing=No, Revision=1, Status="MCL Design", Supplier 1="Microchip Technology", Supplier Part Number 1=MCP6V14-E/ST, Symbol="MCP6XX4_9 SOIC-14_TSSOP-14_PDIP-14", Type=OpAmp
VDAC "VDD loop" VREF: library part CON1084, "Test Point", Manufacturer 1=Keystone, Manufacturer 2="FuZhou XiXiang", Manufacturer Part Number 1=5010, Manufacturer Part Number 2="Test Point-1P-DIP-H4.6-Ø2.5-RED", Manufacturer Part Number 3="Test Point-1P-DIP-H8.1-Ø3.2-RED", Supplier Part Number 1=36-5010-ND, Category=Connector, ComponentLink1Description="SVN Datasheet", ComponentLink1URL=https://chn-vm-apps.microchip.com/mchprepo/parts/Datasheets/5010.pdf, ComponentLink2Description="Local Datasheet", ComponentLink2URL=C:\ALTIUM_WORK\00001_MCHP-CDB\Datasheets\5010.pdf, ComponentLink3Description="Open Symbol", ComponentLink3URL="C:\ALTIUM_WORK\00001_MCHP-CDB\Library\LibraryRefs\Test Point.SchLib", ComponentLink4Description="Open Footprint", ComponentLink4URL=C:\ALTIUM_WORK\00001_MCHP-CDB\Library\Footprints\CON_TP_TH_V_RED_KEC_5010.PcbLib, ComponentLink5Description="Open Footprint 2", ComponentLink6Description="Open Footprint 3", ComponentLink7Description="Open Footprint 4", Description_="CON TP LOOP Red TH", Dev Tools Status=Production, Manufacturer 3="FuZhou XiXiang", MCHP-ID=CON1084, Owner="Stephen Humberd", Populated=DNP, Quantity Override=1, Revision=D, Status="MCL Design", Supplier 1=Digi-Key, Supplier 2="FuZhou XiXiang", Supplier 3="FuZhou XiXiang", Supplier Part Number 2="Test Point-1P-DIP-H4.6-Ø2.5-RED", Supplier Part Number 3="Test Point-1P-DIP-H8.1-Ø3.2-RED", Symbol="Test Point", Type="Test Point"

## Free pads (board coordinates)
  round 0 hole 3.2 unplated mask+0.2: 0(3,3) 0(3,102) 0(167.1,3) 0(167.1,102)
  round 0 / inner round 3.6 / far side round 0 hole 3 unplated mask+0.076: ADA1(83.255,69.001)
  round 0 / inner round 2.5 / far side round 0 hole 3 unplated mask+0.076: ADA2(117.255,69.001) ADA3(117.255,36.001) ADA4(83.255,36.001)

## Via types
v1: diameter 0.8, hole 0.4, Top Layer to Bottom Layer, 30 vias
v2: diameter 0.7, hole 0.3, Top Layer to Bottom Layer, 24 vias

## Nets (pads, with @x,y where several pads share a name; then routed paths per layer and width w, separated by ;. In a path a pad name is that pad's centre, name@x,y a point inside that pad or via, vN(x,y) a via of type N, cw(c..) or ccw(c..) an arc to the next point about the centre after c; other vN are vias at no path point)
2.5V: R1.2 R21.1 U2.1 U3.3 VREF.1 | length 32.1
  Top Layer w0.2: 146.561,44.472 146.561,46.394 146.816,46.649 U3.3@148.041,46.649 150.251,46.649 150.954,47.352
  Top Layer w0.3: 146.561,44.472 R1.2@146.561,39.202 ; VREF.1@147.5,29.4 147.5,29.855 146.561,30.794 R1.2@146.561,39.202 ; U2.1@149.339,39.202 R1.2@146.561,39.202 ; 150.954,47.352 151.765,48.163 R21.1@151.765,54.199
3.3V: "VDD loop.1" "VDD MCU.1" C2.2 C3.2 C4.1 C11.1 C21.2 C31.1 C_MCU.1 C_OP1.1 J_Breakout2.9 J_display.2 J_display.3 J_display.9 J_ICSP.2 J_Sensor.1 R_MCLR.1 U1.2 U2.4 U2.6 U3.1 U4.8 U5.5 U_MCU.20 U_OPAMP.4 | length 65.2
  Top Layer w0.2: U3.1@148.041,45.649 149.67,45.649 149.91,45.409 149.91,45.099
  Top Layer w0.254: U_OPAMP.4@16.763,80.788 16.763,83.315 17.9,84.452 v1(17.9,86.5) ; U_MCU.20@54.25,51.625 60.375,51.625 J_Breakout2.9@62.5,49.5 68.35,49.5 C_MCU.1@68.4,49.45
  Top Layer w0.3: U4.8@148.216,62.207 149.464,62.207 149.86,62.603 v2(149.86,65.799) ; 149.91,45.099 C11.1@149.91,43.863 v2@151.589,43.863 ; U2.4@151.739,37.302 153.341,35.7 v1(154.2,35.7) ; U2.6@152.139,39.202 C4.1@154.422,39.202 154.422,41.078 v1(154.4,41.1) ; U5.5@155.222,60.282 154.047,60.282 153.873,60.457 153.74,60.589 152.85,60.589 C31.1@152.85,60.466 152.85,59.372 154.236,57.986 v2(155.667,57.986) ; v1(155.5,43.7) 155.949,44.149 U1.2@158.061,44.149 ; v2@156.701,41.199 C2.2@158.522,41.199 ; C3.2@160.439,41.199 162.201,41.199 v1(162.6,40.8)
  Top Layer w1: J_Sensor.1@26.24,97 26.24,89.61 C_OP1.1@26.25,89.6 ; R_MCLR.1@46.75,68.8 50.1,68.8 v1(51.3,67.6)
  other v2: 156.7,41.2 151.517,43.84
24V_Filtered: C1.2 J_Loop.1 Q1.3 U1.3 | length 33.8
  Top Layer w0.3: Q1.3@155.847,49.873 155.847,48.575 156.423,47.999 159.763,47.999 160.761,47.001 U1.3@160.761,45.099 161.739,45.099 162.921,46.281 C1.2@164.786,46.281
  Top Layer w0.5: C1.2@164.739,46.327 166.9,48.488 166.9,65.83 J_Loop.1@166.8,65.93
24V_IN_Not_Filtered: C_pi1.2 D_TVS.2 FB.1 J_option.2 | length 28.2
  Top Layer w0.5: C_pi1.2@160.3,81.1 161.8,79.6 FB.1@163.9,79.6 165.6,81.3 D_TVS.2@165.6,87.85
  Top Layer w1: J_option.2@155.8,93.7 155.8,88.9 156.7,88 165.45,88 D_TVS.2@165.6,87.85
24V_Jack_Not_Filtered: "24V Jack.1" J_option.1 | length 12.7
  Bottom Layer w1: 142.7,90.6 143.207,90.6 143.9,91.293 143.9,92.8 144.8,93.7 J_option.1@153.26,93.7
24V_Term_Not_Filtered: J_option.3 J_terminal.1 | length 47.1
  PWR w1: J_option.3@158.34,93.7 161.9,90.14 161.9,51.18 162.486,50.594 J_terminal.1@164.739,50.594
C\S\1_DAC: J_Breakout2.3 U3.2 U_MCU.26 | length 117.2
  Top Layer w0.2: U3.2@148.041,46.149 v2(151.589,46.149)
  Top Layer w0.254: U_MCU.26@54.25,55.525 54.288,55.563 56.563,55.563 J_Breakout2.3@62.5,61.5 62.911,61.5 63.311,61.9 v1(76.8,61.9)
  Top Layer w0.3: v1(136,51.3) 136.069,51.231 v2(144.616,51.231)
  Bottom Layer w0.254: v1(76.8,61.9) 104.6,61.9 106,60.5 106,52.7 107.4,51.3 v1(136,51.3)
  Bottom Layer w0.3: v2(144.616,51.231) 150.953,51.231 151.589,50.594 v2(151.589,46.149)
C\S\2_DP: J_Breakout2.4 U4.1 U_MCU.25 | length 94
  Top Layer w0.254: U_MCU.25@54.25,54.875 57.875,54.875 J_Breakout2.4@62.5,59.5 62.65,59.5 64.282,57.868 134.5,57.868 138.839,62.207 139.403,62.207 U4.1@143.816,62.207
CS3_Adafruit: J_Breakout2.8 J_display.4 U_MCU.21 | length 50.4
  Top Layer w0.254: U_MCU.21@54.25,52.275 61.725,52.275 J_Breakout2.8@62.5,51.5
  Bottom Layer w0.254: J_Breakout2.8@62.5,51.5 81.756,51.5 J_display.4@97.715,35.541
DAC_OFFSET: J_Breakout1.4 U_MCU.4 U_OPAMP.12 | length 44
  Top Layer w0.254: J_Breakout1.4@39,59.5 41.1,59.5 45.725,54.875 U_MCU.4@47.35,54.875
  Top Layer w0.3: U_OPAMP.12@17.413,74.888 17.413,74.164 17.814,73.763 19.309,73.763 19.485,73.587 19.485,73.551 19.7,73.335 v1(19.7,73.2)
  Bottom Layer w0.254: v1(19.7,73.2) 20.7,72.2 28.2,72.2 30.7,69.7 30.7,60.7 31.9,59.5 J_Breakout1.4@39,59.5
EIN_Adafruit: J_Breakout2.11 J_display.1 U_MCU.18 | length 42.4
  Top Layer w0.254: U_MCU.18@54.25,50.325 54.288,50.287 56.813,50.287 60.627,46.473 62.277,46.473 62.5,46.25 J_Breakout2.11@62.5,45.5
  Bottom Layer w0.254: J_Breakout2.11@62.5,45.5 80.136,45.5 J_display.1@90.095,35.541
Float_GND: C_pi1.1 C_pi2.1 C_Power_24V.1 D_protect.1 D_TVS.1 R34.2 | length 68.4
  Top Layer w0.5: C_pi2.1@158.7,78.1 C_pi1.1@158.7,81.1 v1(158.7,84.4) ; D_TVS.1@165.6,92.15 168.1,89.65 168.1,81.15 C_Power_24V.1@166.9,79.95
  Top Layer w1: D_protect.1@136.6,70.139 136.661,70.2 R34.2@153.3,70.2 153.3,72.7 C_pi2.1@158.7,78.1 ; v1(163.3,96) 164.8,96 165.6,95.2 D_TVS.1@165.6,92.15
  Bottom Layer w1: v1(158.7,84.4) 162.714,84.4 163.3,84.986 v1(163.3,96)
GND: "GND OpAmp.1" C1.1 C2.1 C3.1 C4.2 C5.1 C11.2 C21.1 C31.2 C_LP.1 C_MCU.2 C_OP1.2 GND.1 J_Breakout1.8 J_Breakout2.10 J_display.7 J_ICSP.3 J_Sensor.4 JOYSTICK.5 JOYSTICK.7 JOYSTICK.8 R11.1 R32.2 R33.1 SW_MCLR.3 SW_MCLR.4 U1.1 U2.2 U2.3 U2.5 U3.7 U4.4 U5.2 U5.4 U_MCU.8 U_MCU.19 U_OPAMP.11 | length 18.6
  Top Layer w0.2: R11.1@142.541,49.6 142.541,47.4 142.791,47.149 143.741,47.149 U3.7@143.991,47.149
  Top Layer w0.254: U_OPAMP.11@16.763,74.888 16.763,73.538 18.4,71.9 v1(18.4,71.1) ; J_Breakout1.8@39,51.5 39.775,52.275 U_MCU.8@47.35,52.275 ; U2.5@151.739,38.252 152.978,38.252 153.024,38.206 153.296,38.206 v1(153.4,38.102)
  other v1: 154.3,45.9
  other v2: 122.3,6.9 86.8,7.2 51.1,25.5 44.4,36.3 123.7,37.1 56.6,38.8 94.4,46.3 34.5,51.1 50.8,52.5 147.9,58.1 156.9,66.1 15.1,77.5 20.1,77.8 62.3,89.2
I2C_SCK: J_Breakout1.14 U_MCU.14 | length 12.3
  Top Layer w0.254: J_Breakout1.14@39,39.5 47.35,47.85 U_MCU.14@47.35,48.375
I2C_SDA: J_Breakout2.14 U_MCU.15 | length 12.3
  Top Layer w0.254: U_MCU.15@54.25,48.375 54.25,47.75 J_Breakout2.14@62.5,39.5
INA_OUT: "Opamp Out.1" C_OP4.2 R_OP6.2 R_OP8.1 U_OPAMP.8 | length 24.6
  Top Layer w0.254: U_OPAMP.8@14.813,74.888 14.813,68.438 15.8,67.45 19.1,67.45 R_OP6.2@19.25,67.3 R_OP8.1@19.25,62.3 16.8,62.3 15.85,61.35 15.85,56.9
JOY1: J_Breakout1.12 R_joystick1.1 U_MCU.12 | length 40.6
  Top Layer w0.254: U_MCU.12@47.35,49.675 47.312,49.637 45.137,49.637 J_Breakout1.12@39,43.5 37.4,43.5 35.2,41.3 35.2,36.3 48.2,23.3 R_joystick1.1@48.2,21.75